# Altium PCB A3988 Breakout.PcbDoc
Units mil, origin at the board's own origin, x right, y up, seen from the top; angles counter-clockwise.
Board outline 2250 x 2250 mil, 4 copper layers (Top Layer, Signal Layer, Ground Plane, Thermal Layer), stack 72.6 mil thick; 24 components, 35 nets, 103 pads, 51 vias.
Unrouted connection lines stored in the file: 1.
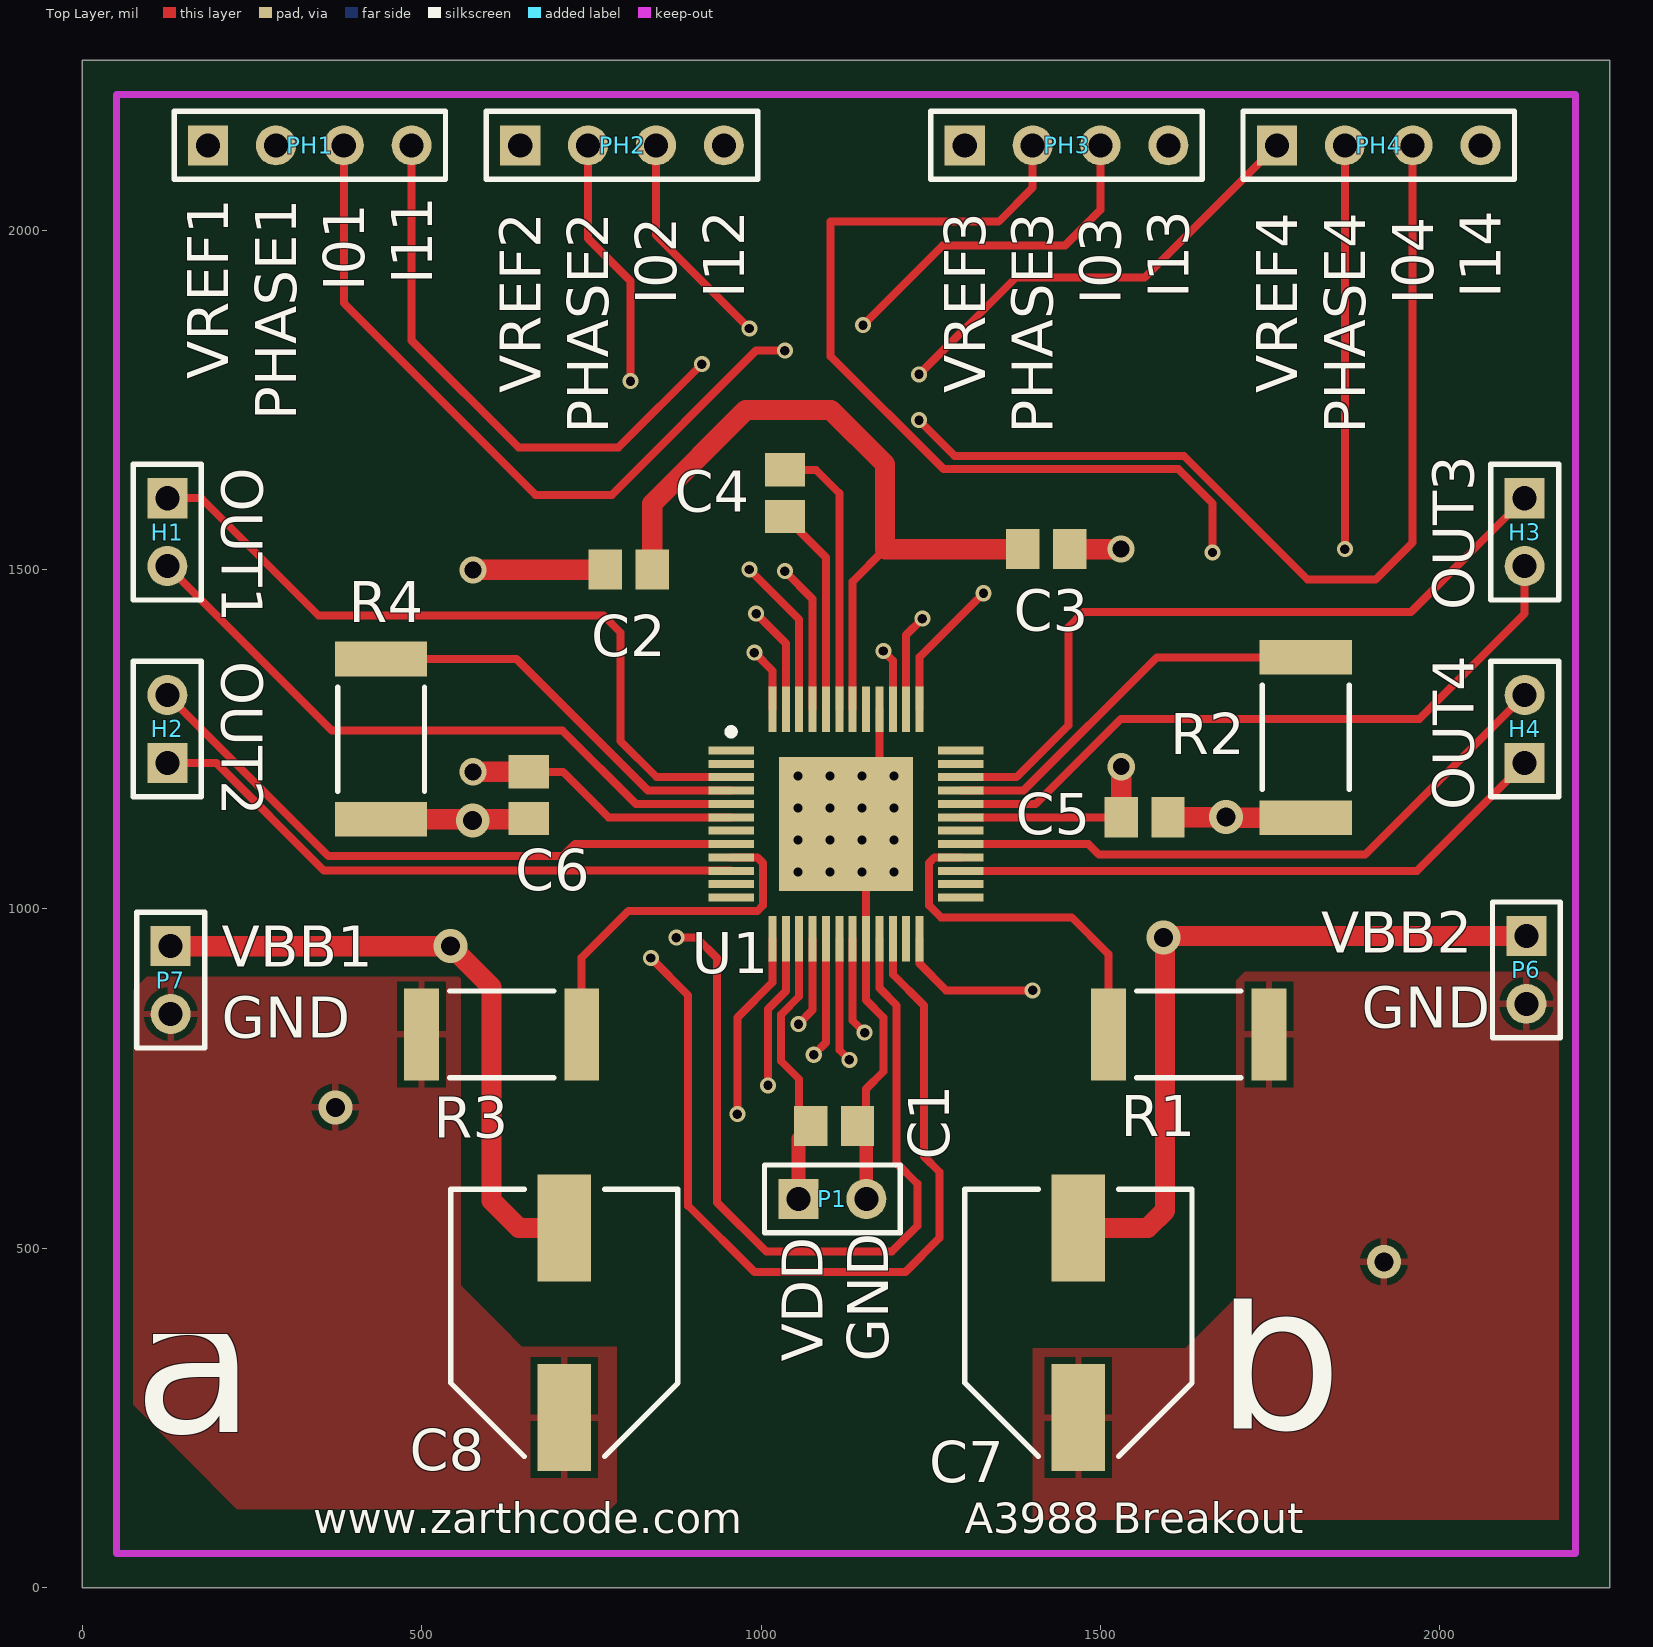
[diagram p0: Top Layer view]
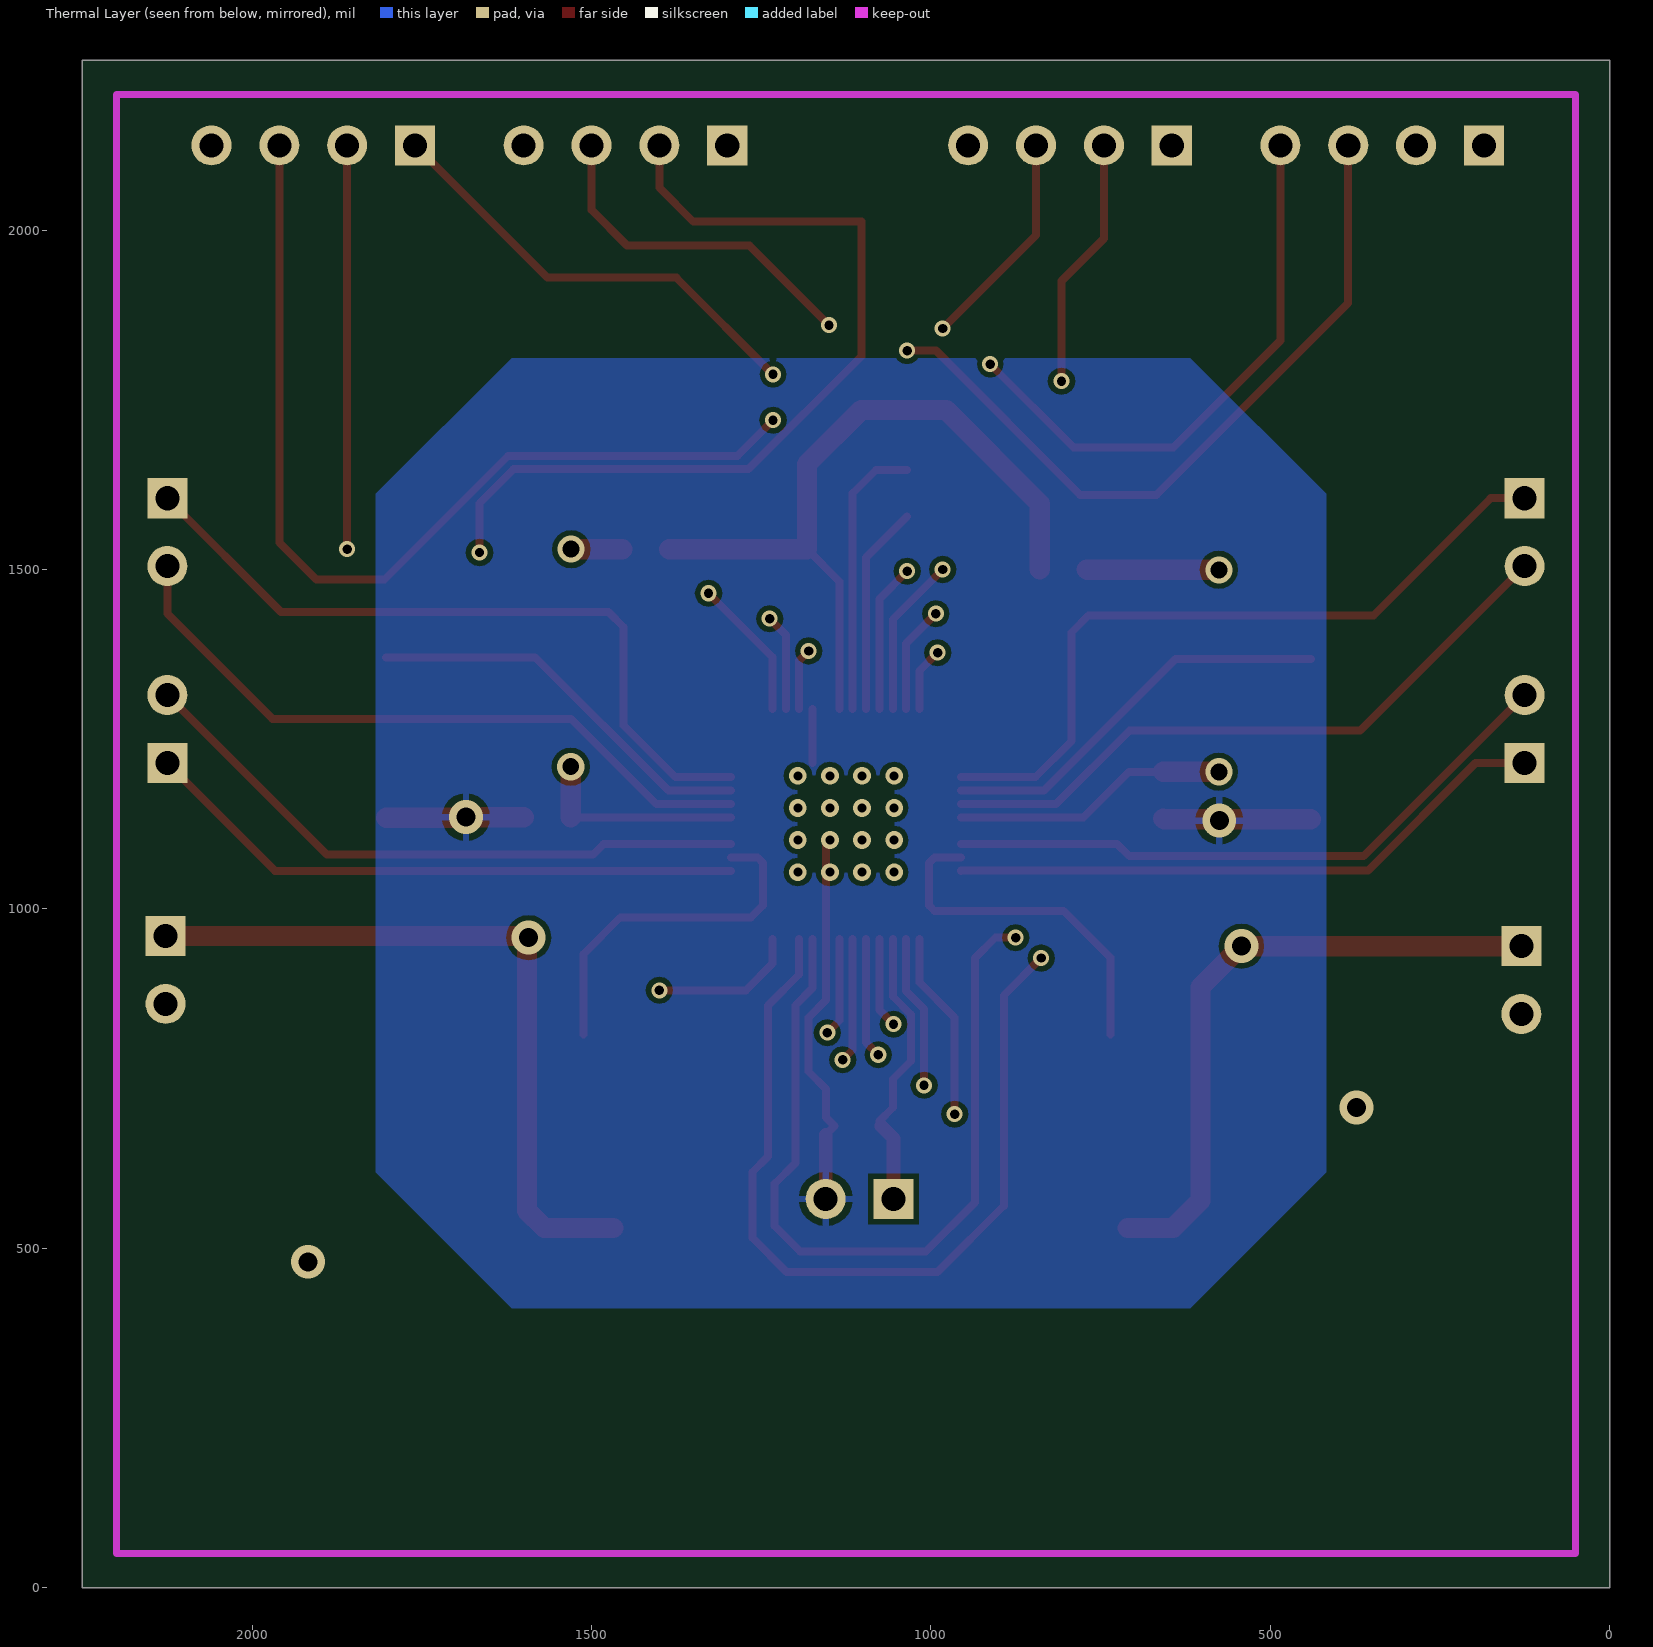
[diagram p1: Thermal Layer view, seen from below]
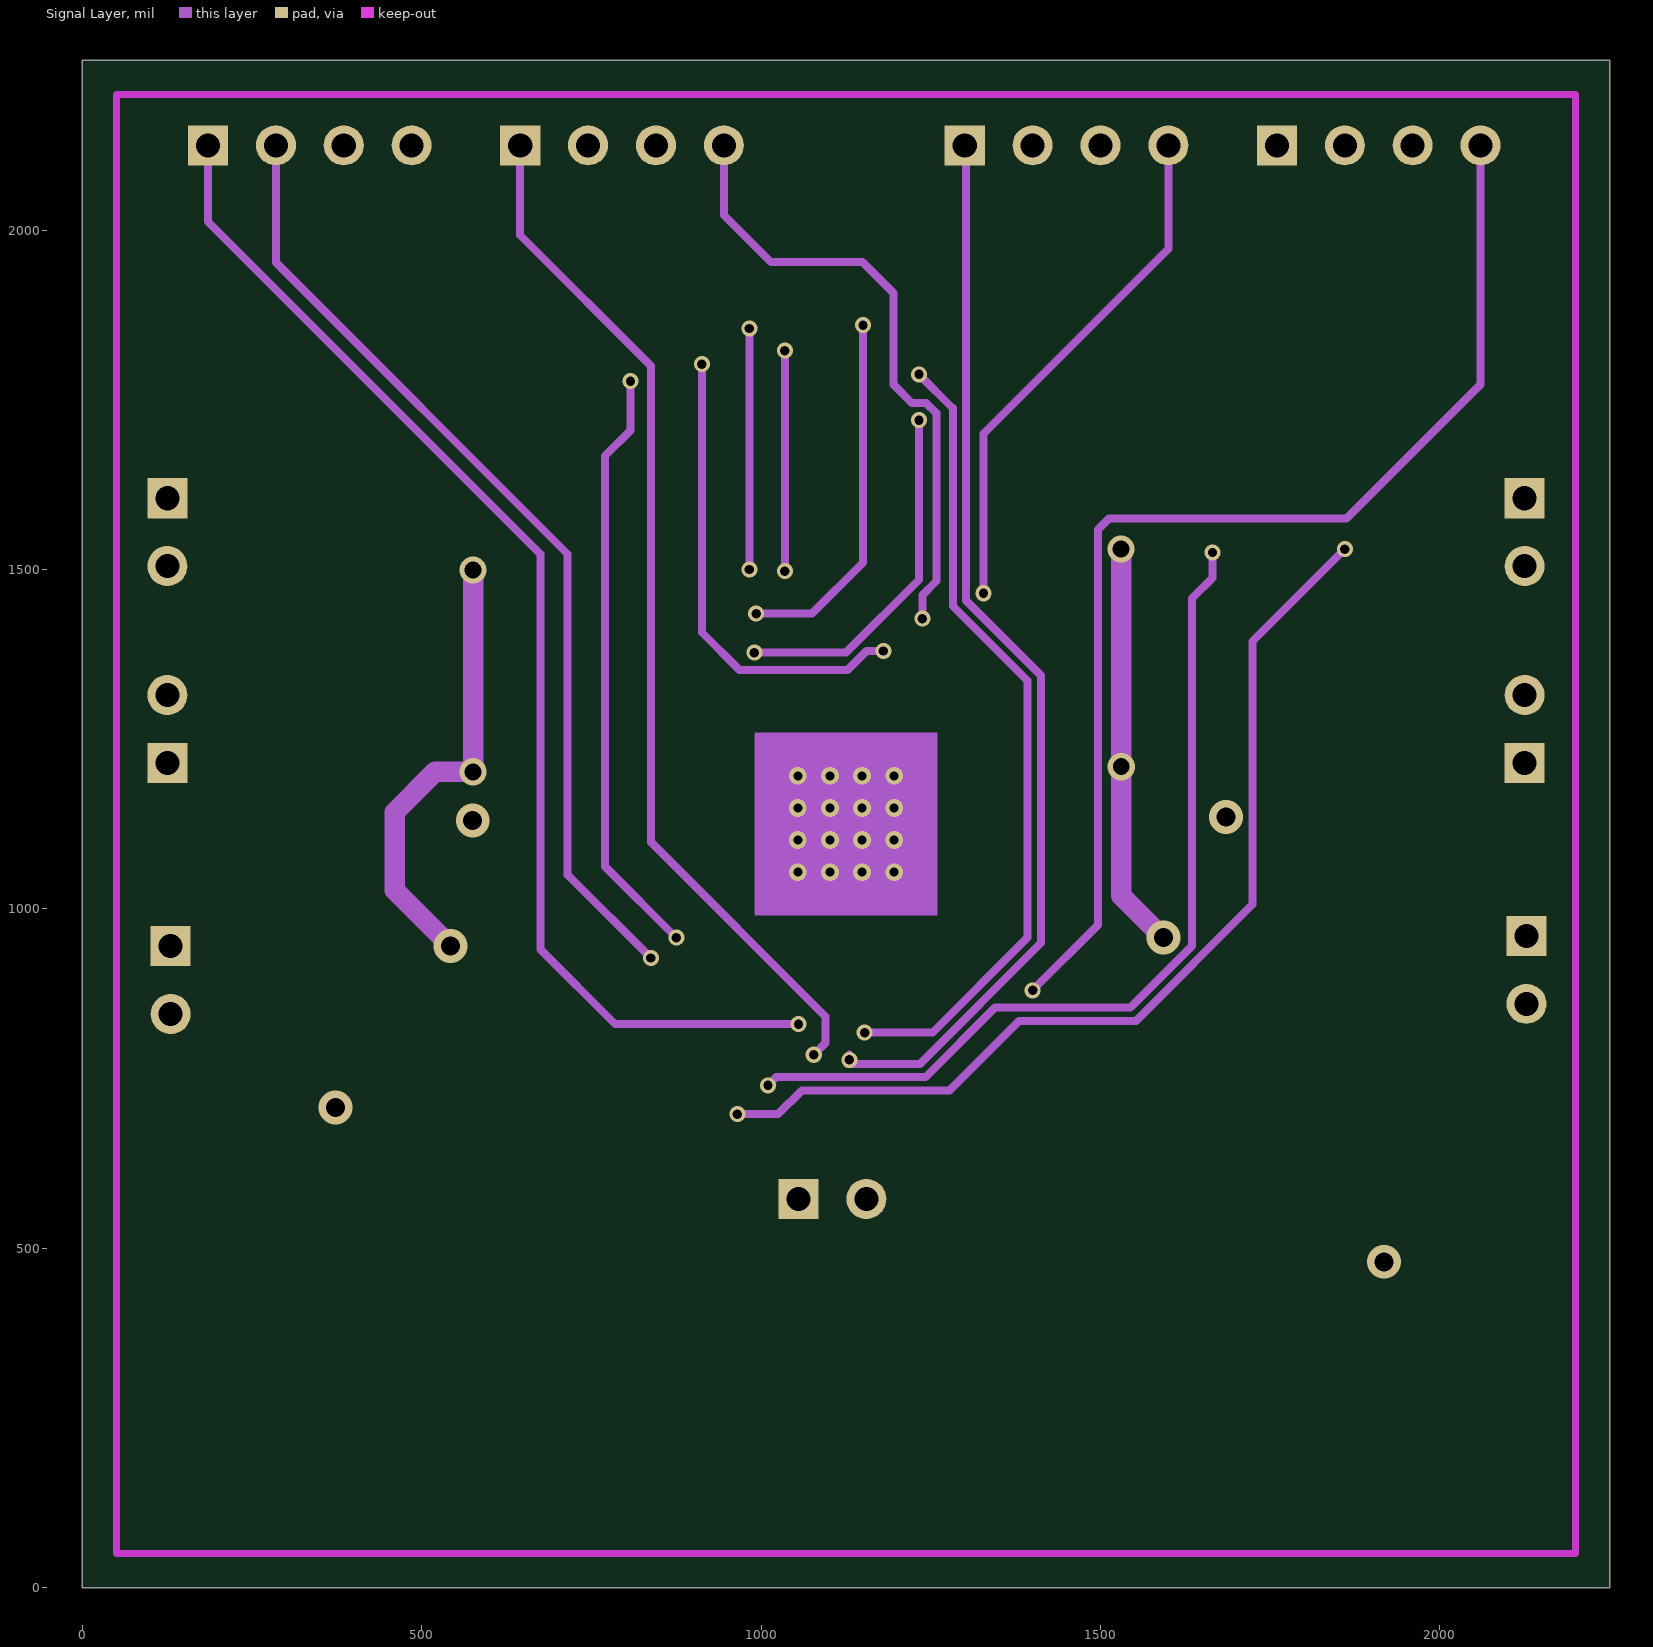
[diagram p2: Signal Layer]
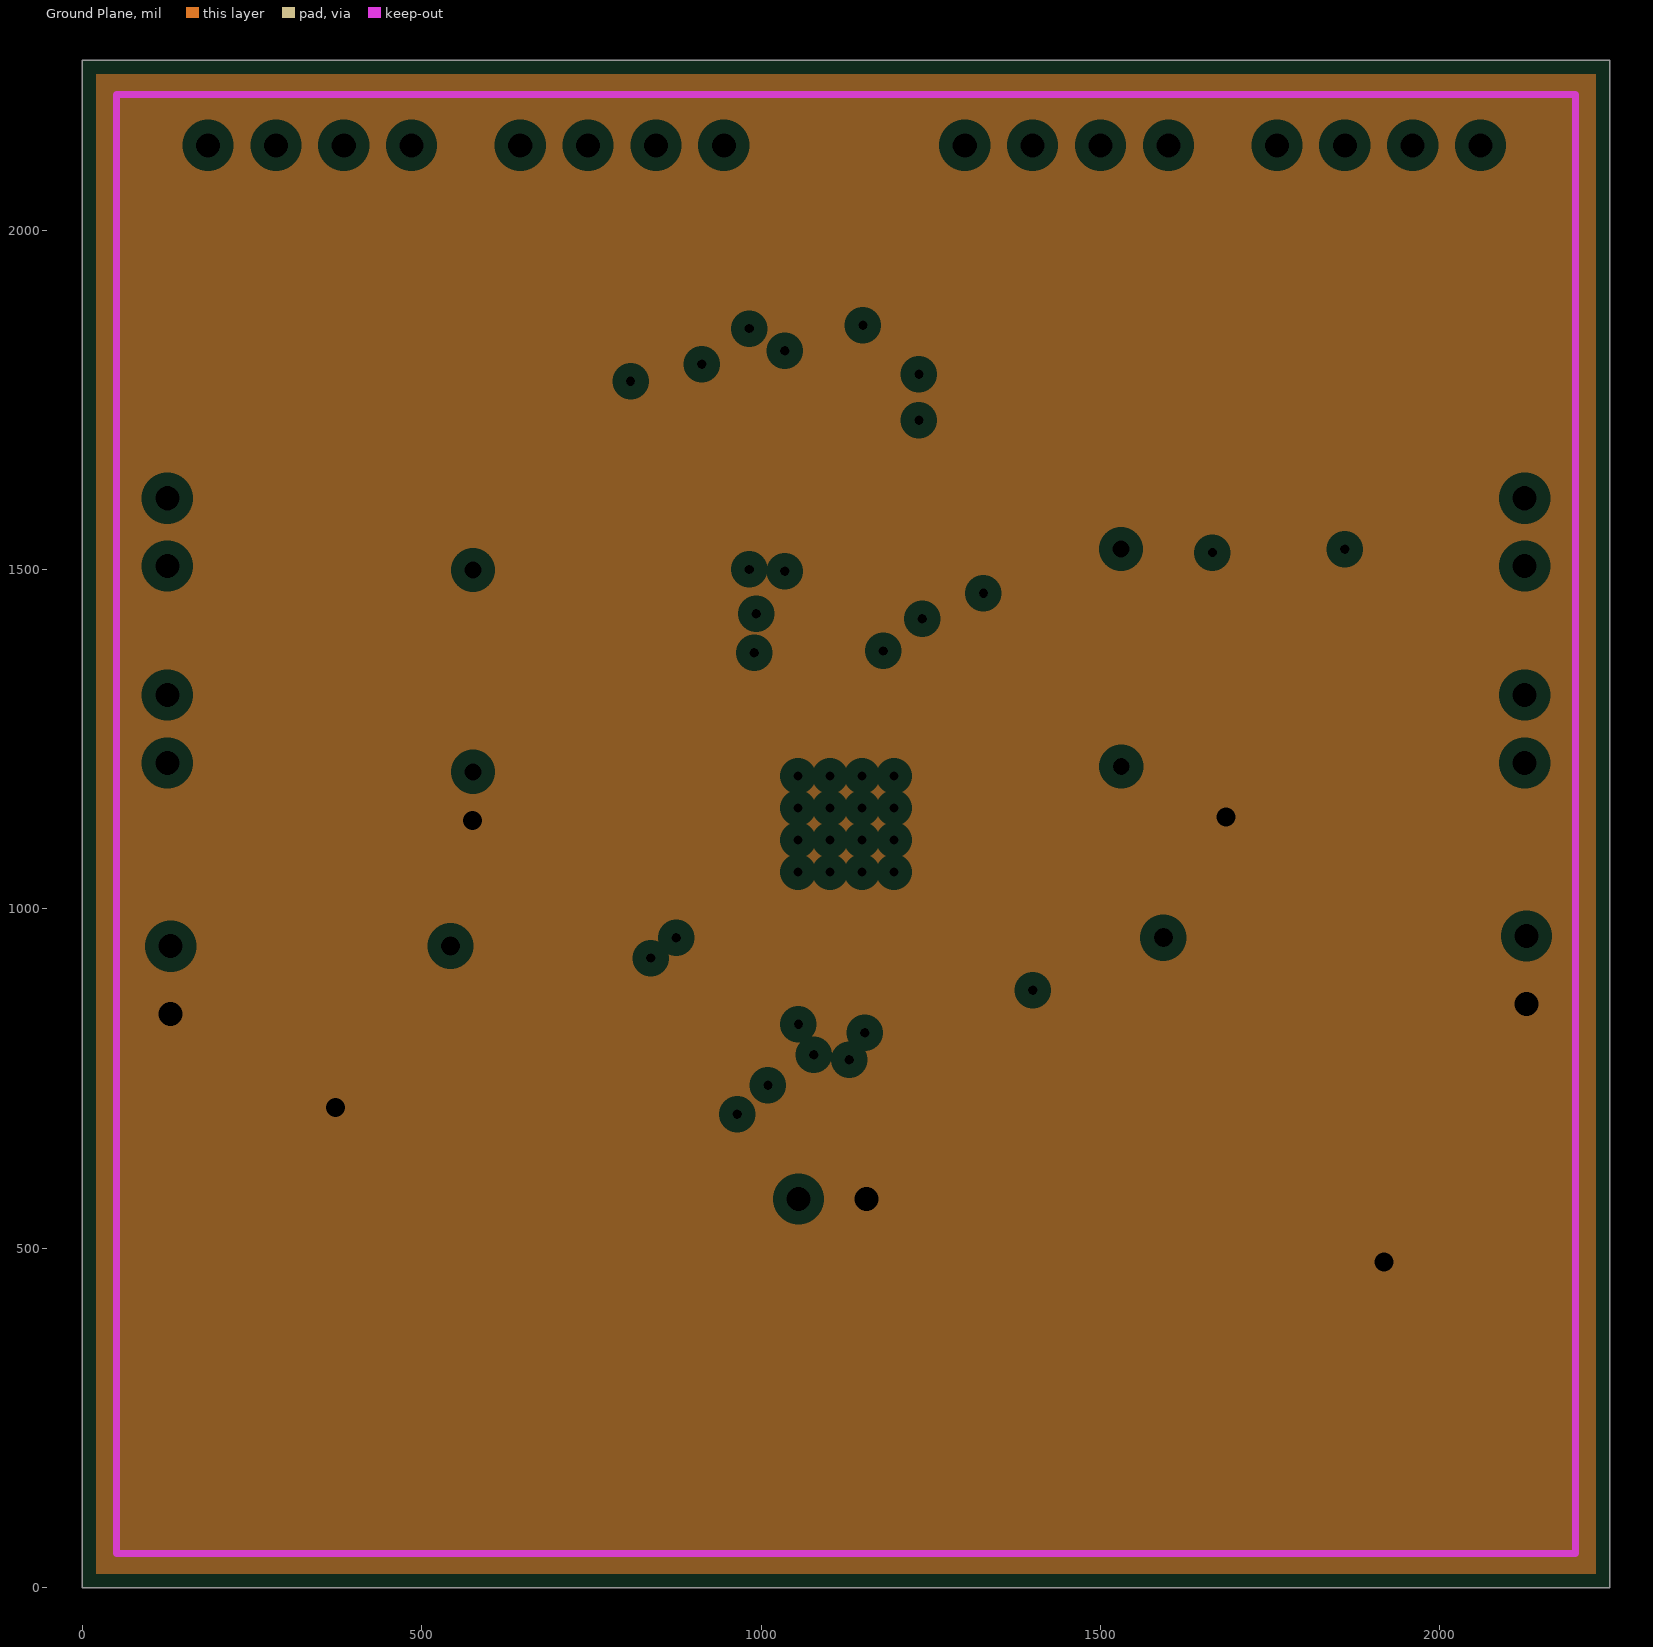
[diagram p3: Ground Plane, clearances drawn from the general rule]

## Layer stack, top to bottom
Top Layer: signal copper 2.8
Dielectric: prepreg 12.6, FR-4, Dk 4.8
Signal Layer: signal copper 1.4
Dielectric: core 39, FR-4, Dk 4.8
Ground Plane: plane copper 1.4, net GND
Dielectric: prepreg 12.6, FR-4, Dk 4.8
Thermal Layer: signal copper 2.8

## Board outline
0,0 2250,0 2250,2250 0,2250

## Design rules (kind name [scope] priority, off if disabled: settings)
AssemblyTestPointUsage [All] p1 off:
AssemblyTestpoint [All] p1 off: testpointundercomponent=TRUE minsize=40 maxsize=100 preferedsize=60 minholesize=0 maxholesize=40 preferedholesize=32 testpointgrid=1 usegrid=TRUE gridtolerance=0.01 allowsidetop=TRUE allowsidebottom=TRUE
Clearance [All] p1: gap=7.8
FabricationTestPointUsage [All] p1 off: valid=0 allowmultiple=FALSE
FabricationTestpoint [All] p1 off: side=3 testpointundercomponent=TRUE minsize=40 maxsize=100 preferedsize=60 minholesize=0 maxholesize=40 preferedholesize=32 testpointgrid=1 allowsidetop=TRUE allowsidebottom=TRUE usegrid=TRUE gridtolerance=0.01
PlaneClearance [All] p1: clearance=20
PlaneConnect [All] p1: planeconnectstyle=Relief reliefexpansion=20 reliefentries=4 reliefconductorwidth=10 reliefairgap=10
PolygonConnect [All] p1: connectstyle=Relief reliefconductorwidth=10 reliefentries=4 polygonreliefangle="90 Angle" airgapwidth=10
RoomDefinition "A3988 Breakout" [InComponentClass('A3988 Breakout')] p1: confinementstyle=ConfineIn formatcopy=TRUE lockcomponents=FALSE outline 50,50 50,2200 2200,2200 2200,50
RoutingLayers [All] p1: top layer_v5=TRUE mid layer 1_v5=TRUE bottom layer_v5=FALSE
RoutingVias [All] p1: holewidth=10 width=40 viastyle="Through Hole" minholewidth=8 minwidth=16 maxholewidth=28 maxwidth=50
ShortCircuit ShortCircuit_Thermal [OnLayer('Multi-Layer') vs InNet('GND')] p1: allowed=TRUE
ShortCircuit ShortCircuit_1 [All] p2: allowed=FALSE
SilkscreenOverComponentPads [All] p1: minsilkscreentomaskgap=6
SolderMaskExpansion [All] p1: expansion=4
Width [All] p1: maxlimit=30 minlimit=11 preferedwidth=11.81
19 further rules are at their usual default settings.

## Components (designator, comment, footprint, x,y, rotation, side; value= is the part's Value field where it differs from the comment)
C1 ".22uF" C0805N 1107.5,680 r180 top
C2 ".1uF" C0805N 805,1500 r0 top
C3 ".1uF" C0805N 1420,1530 r180 top
C4 ".1uF" C0805N 1035,1612.5 r90 top
C5 ".22uF" C0805N 1565,1135 r180 top
C6 ".22uF" C0805N 657.5,1167.5 r90 top
C7 "100uF" F 1467.5,390 r270 top
C8 "100uF" F 710,390 r270 top
H1 "OUT1" HDR1X2 125,1605 r270 top
H2 "OUT2" HDR1X2 125,1215 r90 top
H3 "OUT3" HDR1X2 2125,1605 r270 top
H4 "OUT4" HDR1X2 2125,1215 r90 top
P1 "Logic Power" HDR1X2 1055,572.5 r0 top
P6 "VBB1 Header" HDR1X2 2127.5,960 r270 top
P7 "VBB2 Header" HDR1X2 130,945 r270 top
PH1 "Phase 1" HDR1X4 185,2125 r0 top (schematic designator P2)
PH2 "Phase 2" HDR1X4 645,2125 r0 top (schematic designator P3)
PH3 "Phase 3" HDR1X4 1300,2125 r0 top (schematic designator P4)
PH4 "Phase 4" HDR1X4 1760,2125 r0 top (schematic designator P5)
R1 ".33" R2512N 1630,815 r0 top
R2 ".33" R2512N 1802.5,1252.5 r270 top
R3 ".33" R2512N 617.5,815 r180 top
R4 ".33" R2512N 440,1250 r270 top
U1 "A3988" JP 1125,1125 r0 top

## Footprints (in the part's own frame and the unit in brackets; to place one, negate y for a bottom-side part, rotate by r counter-clockwise, add the part's x,y. Pads: shape width x height; smd on the part's side, far side on the other; paste and mask are expansions set on the pad)
C0805N [mm] "Chip Capacitor, 2-Leads, Body 2.0x1.3mm, IPC Medium Density"
  rect 1.25x1.5 smd: 1(-0.875,0) 2(0.875,0)
  body extent -1.1,-0.72 1.1,0.72, height 1.45
F [mm]
  rect 4x2 smd: 1(-3.55,0) 2(3.55,0)
  silkscreen extent -5,-4.25 5,4.25
HDR1X2 [mm] "Connector; Header; 2 Position"
  rect 1.5x1.5 hole 0.9: 1(0,0)
  round 1.5 hole 0.9: 2(2.54,0)
  silkscreen extent -1.27,-1.27 3.81,1.27
HDR1X4 [mm] "Connector; Header; 4 Position"
  rect 1.5x1.5 hole 0.9: 1(0,0)
  round 1.5 hole 0.9: 2(2.54,0) 3(5.08,0) 4(7.62,0)
  silkscreen extent -1.27,-1.27 8.89,1.27
JP [mm] "LQFP, 48-Leads, Body 9.2x9.2mm (max), Pitch 0.50mm, IPC Medium Density"
  rect 1.7x0.3 smd: 1(-4.3,2.75) 2(-4.3,2.25) 3(-4.3,1.75) 4(-4.3,1.25) 5(-4.3,0.75) 6(-4.3,0.25) 7(-4.3,-0.25) 8(-4.3,-0.75) 9(-4.3,-1.25) 10(-4.3,-1.75) 11(-4.3,-2.25) 12(-4.3,-2.75) 25(4.3,-2.75) 26(4.3,-2.25) 27(4.3,-1.75) 28(4.3,-1.25) 29(4.3,-0.75) 30(4.3,-0.25) 31(4.3,0.25) 32(4.3,0.75) 33(4.3,1.25) 34(4.3,1.75) 35(4.3,2.25) 36(4.3,2.75)
  rect 0.3x1.7 smd: 13(-2.75,-4.3) 14(-2.25,-4.3) 15(-1.75,-4.3) 16(-1.25,-4.3) 17(-0.75,-4.3) 18(-0.25,-4.3) 19(0.25,-4.3) 20(0.75,-4.3) 20(1.25,4.3) 21(1.25,-4.3) 22(1.75,-4.3) 23(2.25,-4.3) 24(2.75,-4.3) 37(2.75,4.3) 38(2.25,4.3) 39(1.75,4.3) 41(0.75,4.3) 42(0.25,4.3) 43(-0.25,4.3) 44(-0.75,4.3) 45(-1.25,4.3) 46(-1.75,4.3) 47(-2.25,4.3) 48(-2.75,4.3)
  rect 5x5 smd: PAD(0,0)
  silkscreen extent -4.42,3.33 -4.17,3.57, body extent -3.5,-3.5 3.5,3.5, height 1.6
R2512N [mm] "Chip Resistor, 2-Leads, Body 6.4x3.2mm, IPC Medium Density"
  rect 1.3x3.45 smd: 1(-3,0) 2(3,0)
  silkscreen extent -1.95,-1.63 1.95,1.63, body extent -3.3,-1.7 3.3,1.7, height 0.7

## Part data
C1 C2 C3 C4 C5 C6: library part Capacitor
C7 C8: library part "Electrolytic Capacitor"
H1 H2 H3 H4 P1 P6 P7: library part "Header 2", "Header, 2-Pin"
PH1 PH2 PH3 PH4: library part "Header 4", "Header, 4-Pin"
R1 R2 R3 R4: library part Resistor, "Passive Resistor"
U1: "Quad DMOS Full Bridge PWM Motor Driver"

## Via types
v1: diameter 23.62, hole 13.78, Top Layer to Thermal Layer, 25 vias
v2: diameter 25.98, hole 12.99, Top Layer to Thermal Layer, tented top, 16 vias
v3: diameter 50, hole 28, Top Layer to Thermal Layer, 6 vias
v4: diameter 40, hole 25, Top Layer to Thermal Layer, 4 vias

## Nets (pads, with @x,y where several pads share a name; then routed paths per layer and width w, separated by ;. In a path a pad name is that pad's centre, name@x,y a point inside that pad or via, vN(x,y) a via of type N, cw(c..) or ccw(c..) an arc to the next point about the centre after c; other vN are vias at no path point)
GND: C1.1 C5.1 C6.1 C7.2 C8.2 P1.2 P6.2 P7.2 R1.2 R2.2 R3.2 R4.2 U1.20 U1.PAD | length 1055.1
  Top Layer w11.81: U1.PAD@1154.53,1095.47 1154.53,955.71 1154.53,865.47 1180,840 1180,760 1154.53,734.53 1154.53,692.58 C1.1 C1.1@1155,666.95 ; U1.PAD@1174.21,1215.21 U1.20@1174.21,1294.29
  Top Layer w20: P1.2 C1.1@1155,666.95
  Top Layer w30: R4.2 656.34,1131.89 C6.1 ; C5.1 v3(1685,1135) 1685.61,1134.39 R2.2
  other v3: 1917.5,480 372.5,707.5 575,1130
NetC2_2: C2.2 C3.2 U1.42 | length 1113.8
  Top Layer w11.81: U1.42 1134.84,1482.34 1182.5,1530
  Top Layer w30: C2.2 839.45,1596.95 977.5,1735 1102.5,1735 1182.5,1655 1182.5,1530 C3.2
NetC4_1: C4.1 U1.44 | length 308.8
  Top Layer w11.81: C4.1 1095.47,1517.58 U1.44
NetC4_2: C4.2 U1.43 | length 412.5
  Top Layer w11.81: C4.2 1080.55,1646.95 1115.16,1612.34 U1.43
NetPH1_1: PH1.1 U1.16 | length 1947.8
  Top Layer w11.81: v1(1055,830) 1075.79,850.79 U1.16
  Signal Layer w11.81: PH1.1 185,2012.5 675,1522.5 675,940 785,830 v1(1055,830)
NetPH1_2: PH1.2 U1.22 | length 2714.4
  Top Layer w11.81: v1(837.5,927.5) 892.5,872.5 892.5,562.5 990,465 1212.5,465 1262.5,515 1262.5,612.5 1240,635 1240,857.5 1193.9,903.6 U1.22
  Signal Layer w11.81: PH1.2 285,1952.5 715,1522.5 715,1050 v1(837.5,927.5)
NetPH1_3: PH1.3 U1.45 | length 1632.6
  Top Layer w11.81: PH1.3 385,1892.5 667.5,1610 780,1610 992.5,1822.5 v1(1035,1822.5) ; v1(1035,1497.5) 1075.79,1456.71 U1.45
  Signal Layer w11.81: v1(1035,1497.5) v1(1035,1822.5)
NetPH1_4: PH1.4 U1.39 | length 1619.5
  Top Layer w11.81: PH1.4 485,1837.5 642.5,1680 790,1680 v1(912.5,1802.5) ; v1(1180,1380) 1193.9,1366.1 U1.39
  Signal Layer w11.81: v1(912.5,1802.5) 912.5,1407.5 968.02,1351.98 1127.22,1351.98 1155.23,1380 v1(1180,1380)
NetPH2_1: PH2.1 U1.17 | length 1711.8
  Top Layer w11.81: v1(1077.5,785) 1095.47,802.97 U1.17
  Signal Layer w11.81: PH2.1 645,1992.5 837.5,1800 837.5,1098.53 1095,841.03 1095,802.5 v1(1077.5,785)
NetPH2_2: PH2.2 U1.21 | length 2471.7
  Top Layer w11.81: PH2.2 745,1987.5 807.5,1925 v1(807.5,1777.5) ; v1(875,957.5) 905,957.5 935,927.5 935,567.5 1007.5,495 1192.5,495 1230,532.5 1230,595 1199.61,625.39 1199.61,857.89 1174.21,883.29 U1.21
  Signal Layer w11.81: v1(807.5,1777.5) 807.5,1705 770,1667.5 770,1062.5 v1(875,957.5)
NetPH2_3: PH2.3 U1.46 | length 918.2
  Top Layer w11.81: PH2.3 845,1992.5 v1(982.5,1855) ; v1(982.5,1500) 1056.1,1426.4 U1.46
  Signal Layer w11.81: v1(982.5,1500) v1(982.5,1855)
NetPH2_4: PH2.4 U1.38 | length 1070.2
  Top Layer w11.81: U1.38 1213.58,1403.58 v1(1237.5,1427.5)
  Signal Layer w11.81: PH2.4 945,2022.5 1014.25,1953.25 1149.25,1953.25 1195,1907.5 1195,1772.5 1221.98,1745.52 1243.07,1745.52 1258.02,1730.57 1258.02,1482.78 1237.5,1462.27 v1(1237.5,1427.5)
NetPH3_1: PH3.1 U1.18 | length 1786.8
  Top Layer w11.81: U1.18 1115.16,792.34 v1(1130,777.5)
  Signal Layer w11.81: v1(1130,777.5) 1130,785 1127.43,782.43 1127.43,771.72 1127.55,771.59 1234.09,771.59 1412.5,950 1412.5,1343.91 1301.98,1454.43 1301.98,2123.02 PH3.1
NetPH3_2: PH3.2 U1.14 | length 2833
  Top Layer w11.81: v1(1010,740) 1009.87,740.13 1009.87,852.61 1036.42,879.15 U1.14 ; PH3.2 1400,2062.5 1350,2012.5 1102.5,2012.5 1102.5,1813.91 1268.53,1647.89 1614.61,1647.89 1665,1597.5 v1(1665,1525)
  Signal Layer w11.81: v1(1010,740) 1022.11,752.11 1119.3,752.11 1119.43,751.98 1242.22,751.98 1344.72,854.48 1544.22,854.48 1635,945.26 1635,1457.5 1665,1487.5 v1(1665,1525)
NetPH3_3: PH3.3 U1.47 | length 1212.9
  Top Layer w11.81: v1(992.5,1435) 1036.42,1391.08 U1.47 ; v1(1150,1860) 1267.5,1977.5 1447.5,1977.5 1500,2030 PH3.3
  Signal Layer w11.81: v1(992.5,1435) 1075,1435 1150,1510 v1(1150,1860)
NetPH3_4: PH3.4 U1.37 | length 982.6
  Top Layer w11.81: U1.37 1233.27,1370.77 v1(1327.5,1465)
  Signal Layer w11.81: v1(1327.5,1465) 1327.5,1700 1600,1972.5 PH3.4
NetPH4_1: PH4.1 U1.19 | length 2006.9
  Top Layer w11.81: U1.19 1134.84,835.16 v1(1152.5,817.5) ; v1(1232.5,1787.5) 1375,1930 1565,1930 PH4.1
  Signal Layer w11.81: v1(1152.5,817.5) 1252.27,817.5 1392.5,957.73 1392.5,1336.18 1282.37,1446.31 1282.37,1737.63 v1(1232.5,1787.5)
NetPH4_2: PH4.2 U1.13 | length 2341.6
  Top Layer w11.81: v1(965,697.5) 965,840 1016.73,891.73 U1.13 ; v1(1860,1530) PH4.2
  Signal Layer w11.81: v1(965,697.5) 1025,697.5 1060,732.5 1111.18,732.5 1111.31,732.37 1277.37,732.37 1379.87,834.87 1552.34,834.87 1723.71,1006.23 1723.71,1393.71 v1(1860,1530)
NetPH4_3: PH4.3 U1.48 | length 2048.9
  Top Layer w11.81: v1(990,1377.5) 1016.73,1350.77 U1.48 ; v1(1232.5,1720) 1285,1667.5 1622.73,1667.5 1805.23,1485 1905,1485 1960,1540 PH4.3
  Signal Layer w11.81: v1(990,1377.5) 1125,1377.5 1232.5,1485 v1(1232.5,1720)
NetPH4_4: PH4.4 U1.24 | length 1942.9
  Top Layer w11.81: U1.24 1233.27,919.23 1272.5,880 v1(1400,880)
  Signal Layer w11.81: v1(1400,880) 1496.29,976.29 1496.29,1558.79 1512.5,1575 1862.5,1575 2060,1772.5 PH4.4
NetR1_1: R1.1 U1.28 | length 525.8
  Top Layer w11.81: U1.28 1294.22,1075.71 1255.15,1075.71 1247.12,1067.68 1247.12,1005.15 1264.77,987.5 1457.5,987.5 1511.89,933.11 R1.1
NetR2_1: R2.1 U1.33 | length 589.6
  Top Layer w11.81: U1.33 1386.71,1174.21 1583.11,1370.61 R2.1
NetR3_1: R3.1 U1.9 | length 525.4
  Top Layer w11.81: R3.1 735.61,928.11 804.62,997.12 994.85,997.12 1002.88,1005.15 1002.88,1067.68 994.78,1075.79 U1.9
NetR4_1: R4.1 U1.4 | length 596
  Top Layer w11.81: R4.1 639.39,1368.11 833.29,1174.21 U1.4
OUT1A: H1.1 U1.3 | length 1094.7
  Top Layer w11.81: H1.1 175,1605 347.5,1432.5 767.5,1432.5 792.5,1407.5 792.5,1247.5 846.1,1193.9 U1.3
OUT1B: H1.2 U1.5 | length 975.9
  Top Layer w11.81: H1.2 367.5,1262.5 707.5,1262.5 815.47,1154.53 U1.5
OUT2A: H2.1 U1.10 | length 896.5
  Top Layer w11.81: H2.1 197.27,1215 356.09,1056.18 955.63,1056.18 U1.10
OUT2B: H2.2 U1.8 | length 936.5
  Top Layer w11.81: H2.2 362.5,1077.5 707.5,1077.5 725.47,1095.47 U1.8
OUT3A: H3.1 U1.34 | length 1085.9
  Top Layer w11.81: U1.34 1376.4,1193.9 1452.5,1270 1452.5,1415 1475,1437.5 1957.5,1437.5 H3.1
OUT3B: H3.2 U1.32 | length 1016.9
  Top Layer w11.81: U1.32 1404.53,1154.53 1530,1280 1970,1280 2125,1435 H3.2
OUT4A: H4.1 U1.27 | length 896.5
  Top Layer w11.81: U1.27 1966.1,1056.1 H4.1
OUT4B: H4.2 U1.29 | length 934.5
  Top Layer w11.81: U1.29 1482.03,1095.47 1497.5,1080 1890,1080 H4.2
VBB1_POWER: C2.1 C6.2 C8.1 P7.1 U1.6 | length 2209
  Top Layer w11.81: C6.2 708.05,1201.95 775.16,1134.84 U1.6
  Top Layer w30: P7.1 v3(542.5,945) 602.74,884.76 602.74,569.76 642.74,529.76 C8.1 ; v4(575.55,1201.95) C6.2 ; v4(575.55,1499.45) 770,1499.45 C2.1
  Signal Layer w30: v3(542.5,945) 460,1027.5 460,1142.5 519.45,1201.95 v4(575.55,1201.95) v4(575.55,1499.45)
VBB2_POWER: C3.1 C5.2 C7.1 P6.1 U1.31 | length 2060.2
  Top Layer w11.81: U1.31 1530.39,1134.84 C5.2
  Top Layer w30: C3.1 v4(1530,1530) ; C7.1 1569.76,529.76 1595,555 1595,960 P6.1 ; C5.2 v4(1530.55,1209.45)
  Signal Layer w30: v4(1530,1530) 1530.55,1529.45 v4(1530.55,1209.45) 1530.55,1019.45 v3(1592.5,957.5)
VDD: C1.2 P1.1 U1.15 | length 413.3
  Top Layer w11.81: U1.15 1056.1,871.1 1029.48,844.48 1029.48,775.52 1056.1,748.9 1056.1,706.95 C1.2@1075.55,687.5
  Top Layer w20: P1.1 1055,661.95 C1.2
pads on no net: U1.1 U1.2 U1.7 U1.11 U1.12 U1.23 U1.25 U1.26 U1.30 U1.35 U1.36 U1.41
copper on no net:
  other v2: 1054.13,1054.13 1101.38,1054.13 1148.62,1054.13 1195.87,1054.13 1054.13,1101.38 1101.38,1101.38 1148.62,1101.38 1195.87,1101.38 1054.13,1148.62 1101.38,1148.62 1148.62,1148.62 1195.87,1148.62 1054.13,1195.87 1101.38,1195.87 1148.62,1195.87 1195.87,1195.87

## Polygon pours and split planes (outlines as drawn)
GND on Top Layer "Top Layer-GND" (solid, pour order 8): 1400,100 1400,352.34 1625,352.34 1700,428.05 1700,884.79 1700,894.88 1712.5,907.5 2152.5,907.5 2157.5,907.5 2180,884.79 2175,879.74 2175,100
GND on Top Layer "Top Layer-GND" (solid, pour order 4): 75,879.81 95,900 557.5,900 557.5,445.69 617.5,385.11 647.5,354.82 787.5,354.82 787.5,125.14 772.5,110 767.5,115.05 262.5,115.05 227.5,115.05 75,269.01
GND on Thermal Layer "Thermal-GND" (solid, pour order 14): 417.65,1611.53 617.65,1811.53 1617.65,1811.53 1817.65,1611.53 1817.65,611.53 1617.65,411.53 617.65,411.53 417.65,611.53
GND on Ground Plane (split plane): 2229.9,20.1 20.1,20.1 20.1,2229.9 2229.9,2229.9

## Keep-outs
Keep-Out Layer:
  lines w10: 50,50 2200,50 2200,2200 50,2200 50,50

## Other copper
Signal Layer:
  rectangle net GND: 990,990 1260,1260

## Silkscreen, mask and mechanical layers (free items; w line width, h text height)
Top Overlay:
  text "I11" at 515,1920 h60 r90
  text "I01" at 415,1910 h60 r90
  text "I12" at 975,1900 h60 r90
  text "I13" at 1630,1900 h60 r90
  text "I14" at 2090,1900 h60 r90
  text "I02" at 875,1890 h60 r90
  text "I03" at 1530,1890 h60 r90
  text "I04" at 1990,1890 h60 r90
  text "VREF1" at 215,1780 h60 r90
  text "VREF2" at 675,1760 h60 r90
  text "VREF3" at 1330,1760 h60 r90
  text "VREF4" at 1790,1760 h60 r90
  text "PHASE1" at 315,1720 h60 r90
  text "PHASE2" at 775,1700.06 h60 r90
  text "PHASE3" at 1430,1700.06 h60 r90
  text "PHASE4" at 1890,1700.06 h60 r90
  text "OUT1" at 205,1650 h60 r270
  text "OUT3" at 2050,1440 h60 r90
  text "OUT2" at 205,1365 h60 r270
  text "OUT4" at 2050,1145.07 h60 r90
  text "VBB2" at 1825,935 h60
  text "VBB1" at 205,915 h60
  text "GND" at 1885,825 h60
  text "GND" at 205,810 h60
  text "VDD" at 1091,332.5 h60 r90
  text "GND" at 1187.5,332.5 h60 r90
  text "b" at 1670,130 h550
  text "a" at 75,125 h550
  text "www.zarthcode.com" at 340,80 h45
  text "A3988 Breakout" at 1300,80 h45

## Dimensions
50,50 to 2200,50 on Mechanical 1
50,50 to 50,2200 on Mechanical 1